# EAGLE board RGBtlc (EAGLE 6.2)
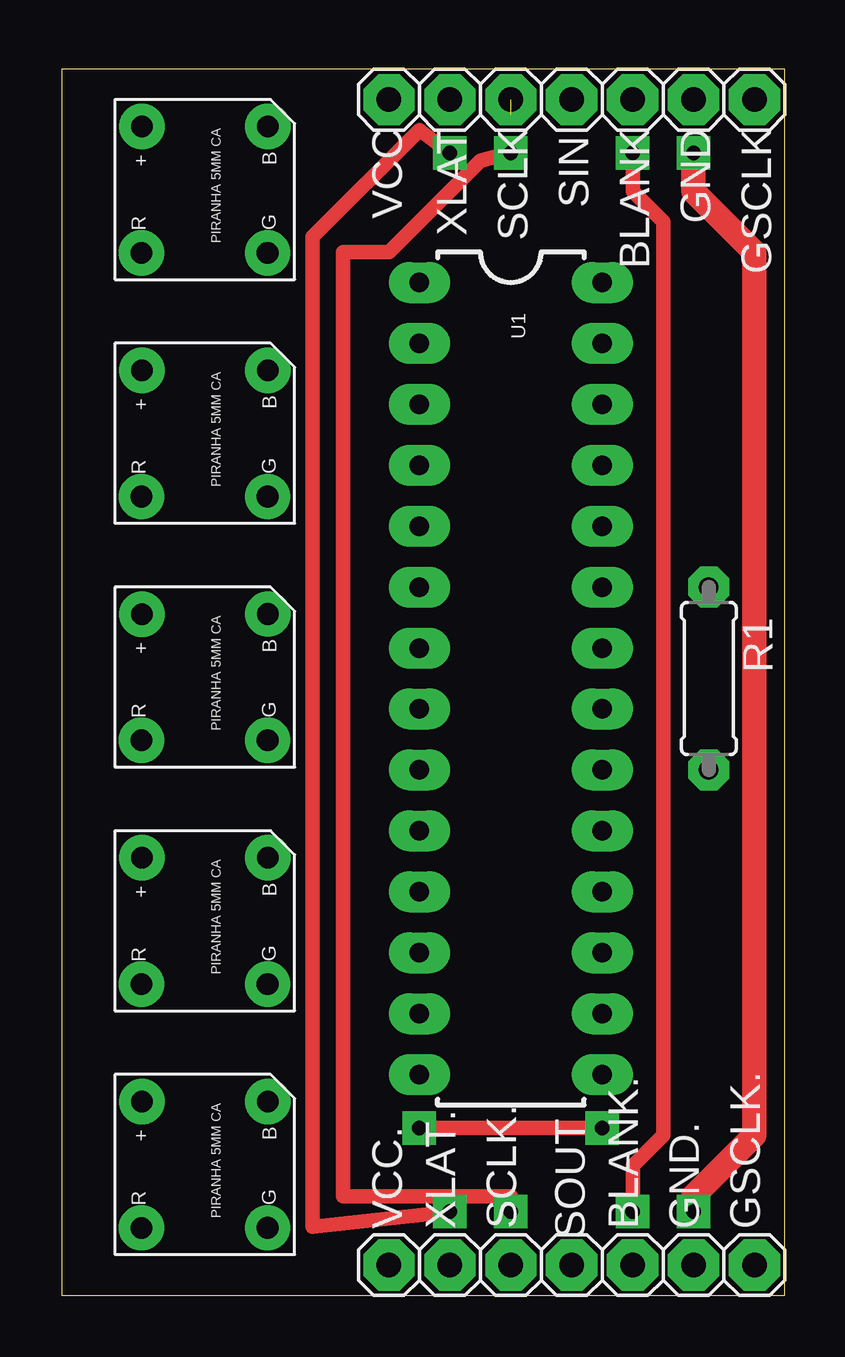
[diagram p0: board, top side]
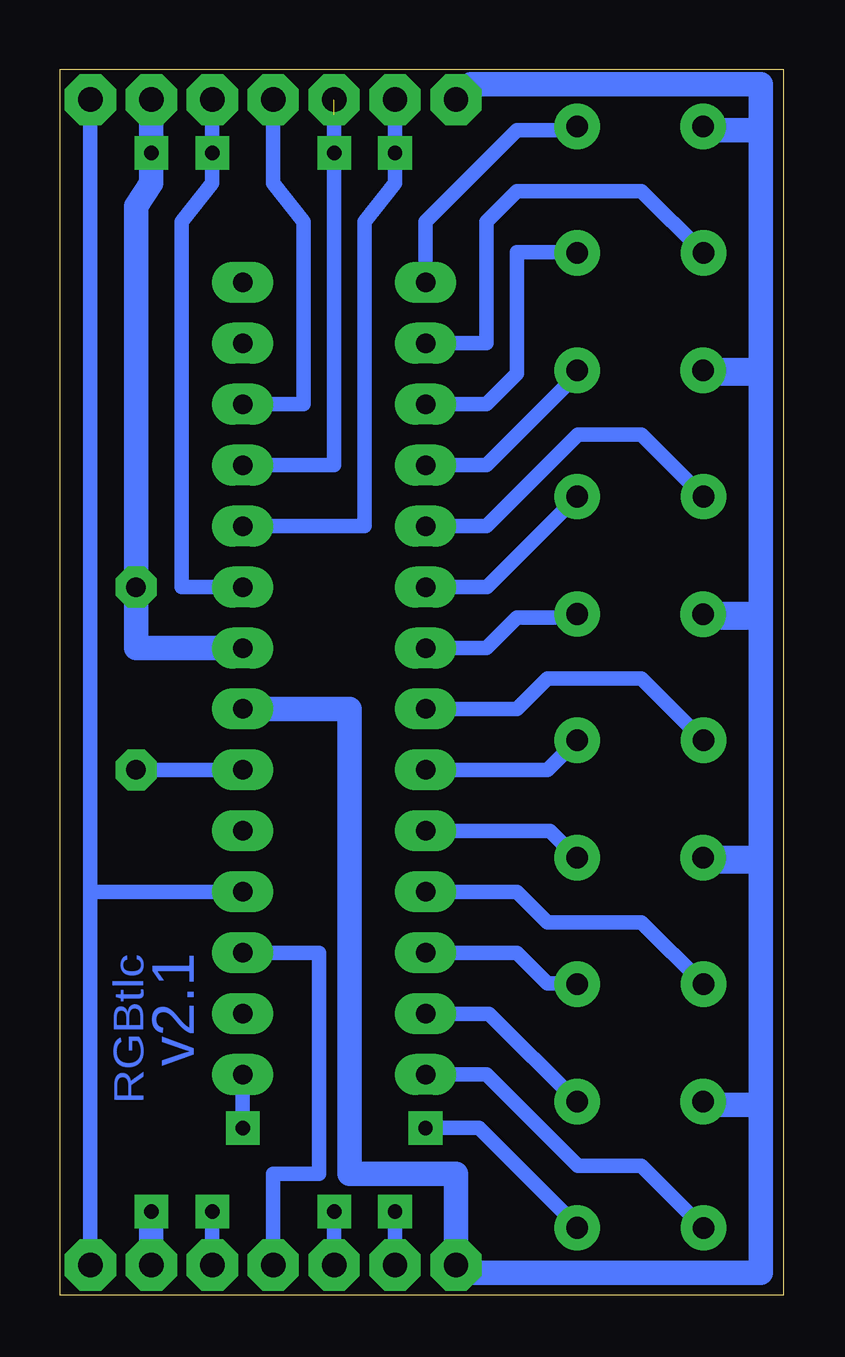
[diagram p1: board, bottom side, seen from below]

Size 30.16 x 51.12 mm. Coordinates in mm from the lower left corner, seen from the top.
Outline: 30.16,51.12 0,51.12 0,0 30.16,0 30.16,51.12
Copper layers (1*16): Top 0.035mm / dielectric 1.5mm / Bottom 0.035mm
Design rules: minimum track width 0.8mm, minimum drill 1mm, track to track 0.8mm, track to pad 0.8mm, pad to pad 0.45mm, via to via 0.8mm, smd to smd 8mil, copper to edge 40mil, drill to drill 8mil, minimum pad ring 0.1mm, minimum via ring 0.4mm, stop-mask expansion 4mil, vias tented up to drill 0mil, thermal gap 10mil

## Footprints (pad centres in the part's own frame; a part is rotated, then mirrored left to right if it is on the bottom)
1X01 = drill 1.016 octagon: 1 0,0
STAND-OFF = hole 3.302: 0,0
0207/7 = drill 0.813 octagon: 1 -3.81,0; 2 3.81,0
DIL28-3 = drill 0.813 long: 1 -16.51,-3.81; 2 -13.97,-3.81; 3 -11.43,-3.81; 4 -8.89,-3.81; 5 -6.35,-3.81; 6 -3.81,-3.81; 7 -1.27,-3.81; 8 1.27,-3.81; 9 3.81,-3.81; 10 6.35,-3.81; 11 8.89,-3.81; 12 11.43,-3.81; 13 13.97,-3.81; 14 16.51,-3.81; 15 16.51,3.81; 16 13.97,3.81; 17 11.43,3.81; 18 8.89,3.81; 19 6.35,3.81; 20 3.81,3.81; 21 1.27,3.81; 22 -1.27,3.81; 23 -3.81,3.81; 24 -6.35,3.81; 25 -8.89,3.81; 26 -11.43,3.81; 27 -13.97,3.81; 28 -16.51,3.81
LED_PIRANHA_5MM = drill 0.9 pad 1.778: + -2.684,-2.684; B -2.688,2.574; G 2.575,2.562; R 2.579,-2.696

## Placement (x,y rotation side)
BLANK  [1X01]  23.81,49.85 180 top
BLANK.  [1X01]  23.81,1.27 0 top
GND  [1X01]  26.35,49.85 180 top
GND.  [1X01]  26.35,1.27 0 top
GSCLK  [1X01]  28.89,49.85 180 top
GSCLK.  [1X01]  28.89,1.27 0 top
JP1  STAND-OFF  [STAND-OFF]  39.05,7.94 180 top  (outside the outline)
JP4  STAND-OFF  [STAND-OFF]  47.94,48.58 180 top  (outside the outline)
R1  2k2  [0207/7]  26.99,25.72 270 top
R2  10k  [0207/7]  44.13,46.04 180 top  (outside the outline)
SCLK  [1X01]  18.73,49.85 180 top
SCLK.  [1X01]  18.73,1.27 0 top
SIN  [1X01]  21.27,49.85 180 top
SOUT  [1X01]  21.27,1.27 180 top
U1  TLC5940-NT  [DIL28-3]  18.73,25.72 270 top
U$1  [LED_PIRANHA_5MM]  6.03,46.04 270 top
U$2  [LED_PIRANHA_5MM]  6.03,35.88 270 top
U$3  [LED_PIRANHA_5MM]  6.03,25.72 270 top
U$4  [LED_PIRANHA_5MM]  6.03,15.56 270 top
U$5  [LED_PIRANHA_5MM]  6.03,5.4 270 top
VCC  [1X01]  13.65,49.85 270 top
VCC.  [1X01]  13.65,1.27 0 top
XLAT  [1X01]  16.19,49.85 180 top
XLAT.  [1X01]  16.19,1.27 0 top

## Library data of the parts
BLANK BLANK. GND GND. GSCLK GSCLK. SCLK SCLK. SIN SOUT VCC VCC. XLAT XLAT. = pinhead
JP1 JP4 = SparkFun-Electromechanical
R1 R2 = rcl
U1 = SparkFun-DigitalIC
U$1-U$5 = jim

## Nets
GND: GND.1 GND..1 R1.1 U1.22
N$1: U1.15 U$5.G
N$2: U1.14 U$5.R
N$3: U1.13 U$5.B
N$4: U1.7 U$3.B
N$5: U1.12 U$4.G
N$6: U1.11 U$4.R
N$7: U1.10 U$4.B
N$8: U1.9 U$3.G
N$9: BLANK.1 BLANK..1 U1.23
N$11: U1.6 U$2.G
N$12: U1.5 U$2.R
N$13: U1.4 U$2.B
N$14: U1.3 U$1.G
N$15: U1.2 U$1.R
N$16: U1.1 U$1.B
N$17: SCLK.1 SCLK..1 U1.25
N$18: SIN.1 U1.26
N$19: U1.24 XLAT.1 XLAT..1
N$20: GSCLK.1 GSCLK..1 U1.18
N$21: SOUT.1 U1.17
N$22: R1.2 U1.20
N$23: U1.8 U$3.R
VCC: U1.21 U$1.+ U$2.+ U$3.+ U$4.+ U$5.+ VCC.1 VCC..1

## Tracks (layer width: path | path; a pad name or v marks a point on that pad's centre or on a via)
GND  (via drill 0.6)
  Top 1.016: v26.35,3.49 26.35,4.13 28.89,6.67 28.89,43.5 26.35,46.04 v26.35,47.63
  Bottom 1.016: U1.22 26.99,26.99 R1.1 26.99,45.4 26.35,46.35 v26.35,47.63 GND.1 | GND..1 v26.35,3.49
N$1  (via drill 0.6)
  Top 0.61: v14.92,6.99 v22.54,6.99
  Bottom 0.61: v22.54,6.99 U1.15 | U$5.G 8.59,2.88 12.7,6.99 v14.92,6.99
N$2
  Bottom 0.61: U1.14 12.38,9.21 8.57,5.4 5.92,5.4 U$5.R
N$3
  Bottom 0.61: U1.13 12.27,11.75 U$5.B
N$4
  Bottom 0.61: U1.7 12.38,26.99 11.11,28.26 8.75,28.26 U$3.B
N$5
  Bottom 0.61: U1.12 11.11,14.29 9.84,13.02 8.63,13.02 U$4.G
N$6
  Bottom 0.61: U1.11 11.11,16.83 9.84,15.56 5.92,15.56 U$4.R
N$7
  Bottom 0.61: U1.10 9.73,19.37 U$4.B
N$8
  Bottom 0.61: U1.9 9.83,21.91 U$3.G
N$9  (via drill 0.6)
  Top 0.61: v23.81,3.49 23.81,5.4 25.08,6.67 25.08,44.77 23.81,46.04 v23.81,47.63
  Bottom 0.61: U1.23 25.08,29.53 25.08,44.77 23.81,46.35 v23.81,47.63 BLANK.1 | BLANK..1 v23.81,3.49
N$11
  Bottom 0.61: U1.6 12.37,29.53 U$2.G
N$12
  Bottom 0.61: U1.5 12.38,32.07 8.57,35.88 5.92,35.88 U$2.R
N$13
  Bottom 0.61: U1.4 12.38,34.61 8.57,38.42 8.57,38.53 U$2.B
N$14
  Bottom 0.61: U1.3 12.38,37.15 11.11,38.42 11.11,43.5 8.63,43.5 U$1.G
N$15
  Bottom 0.61: U1.2 12.38,39.69 12.38,44.77 11.11,46.04 5.92,46.04 U$1.R
N$16
  Bottom 0.61: U1.1 14.92,44.77 11.11,48.58 8.75,48.58 U$1.B
N$17  (via drill 0.6)  (1 unrouted)
  Top 0.61: v18.73,3.49 18.73,4.13 11.75,4.13 11.75,43.5 13.65,43.5 17.46,47.31 v18.73,47.63
  Bottom 0.61: U1.25 18.73,34.61 v18.73,47.63 SCLK.1 | SCLK..1 v18.73,3.49
N$18
  Bottom 0.61: U1.26 20,37.15 20,44.77 21.27,46.35 SIN.1
N$19  (via drill 0.6)
  Top 0.61: v16.19,3.49 10.48,2.86 10.48,44.13 14.92,48.58 v16.19,47.63
  Bottom 0.61: U1.24 17.46,32.07 17.46,44.77 16.19,46.35 v16.19,47.63 XLAT.1 | XLAT..1 v16.19,3.49
N$20
  Bottom 0.61: GSCLK.1 28.89,16.83 | 28.89,16.83 U1.18 | GSCLK..1 28.89,16.83
N$21
  Bottom 0.61: U1.17 19.37,14.29 19.37,5.08 21.27,5.08 SOUT.1
N$22
  Bottom 0.61: U1.20 R1.2
N$23
  Bottom 0.61: U1.8 11.11,24.45 9.84,25.72 5.92,25.72 U$3.R
VCC
  Bottom 1.016: 0.95,48.58 0.95,50.48 13.02,50.48 VCC.1 | U$1.+ 3.2,48.58 0.95,48.58 | 0.95,48.58 0.95,38.42 | 0.95,38.42 3.2,38.42 U$2.+ 1.1,38.56 0.95,38.42 | 0.95,38.42 0.95,28.26 | 0.95,28.26 3.2,28.26 U$3.+ 1.1,28.4 0.95,28.26 | 0.95,28.26 0.95,18.1 | 0.95,18.1 3.2,18.1 U$4.+ 1.1,18.24 0.95,18.1 | 0.95,18.1 0.95,7.94 | 0.95,7.94 3.2,7.94 U$5.+ | U1.21 18.1,24.45 18.1,5.08 13.65,5.08 VCC..1 13.34,0.95 0.95,0.95 0.95,7.94
(copper drawn outside any net)
  shapes: Top area x16

## Text on the board
Bottom: jimblackhurst.com | v2.1 | RGBtlc